# Altium PCB PCB_温湿度传感器v2_2026-05-25.pcbdoc
Units mil, origin at the board's own origin, x right, y up, seen from the top; angles counter-clockwise.
Board outline 2437 x 2255.55 mil, 2 copper layers (Top Layer, Bottom Layer); 4 components, 8 nets, 36 pads, 6 vias.
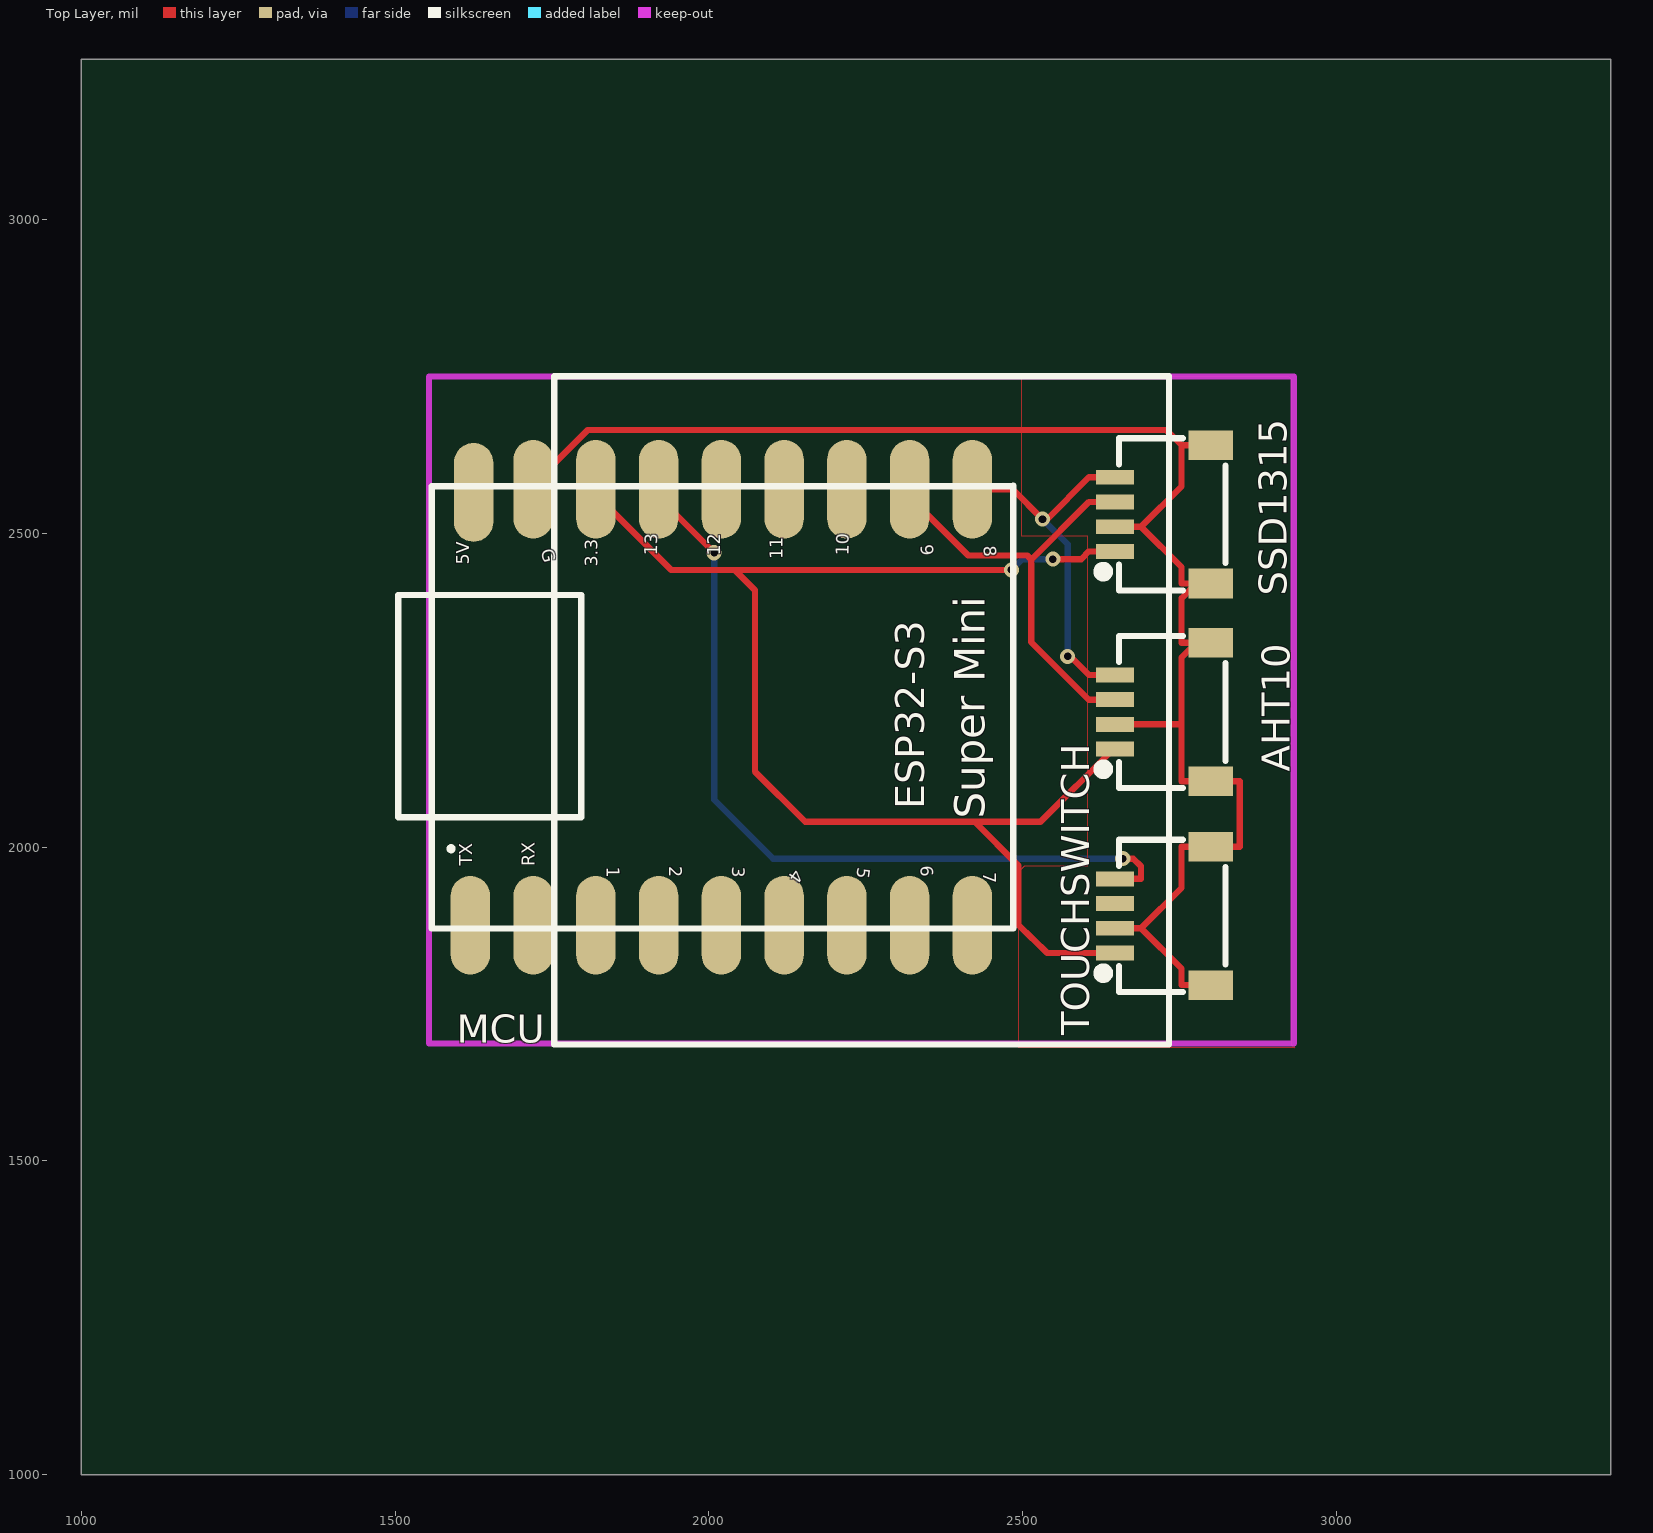
[diagram p0: Top Layer view]
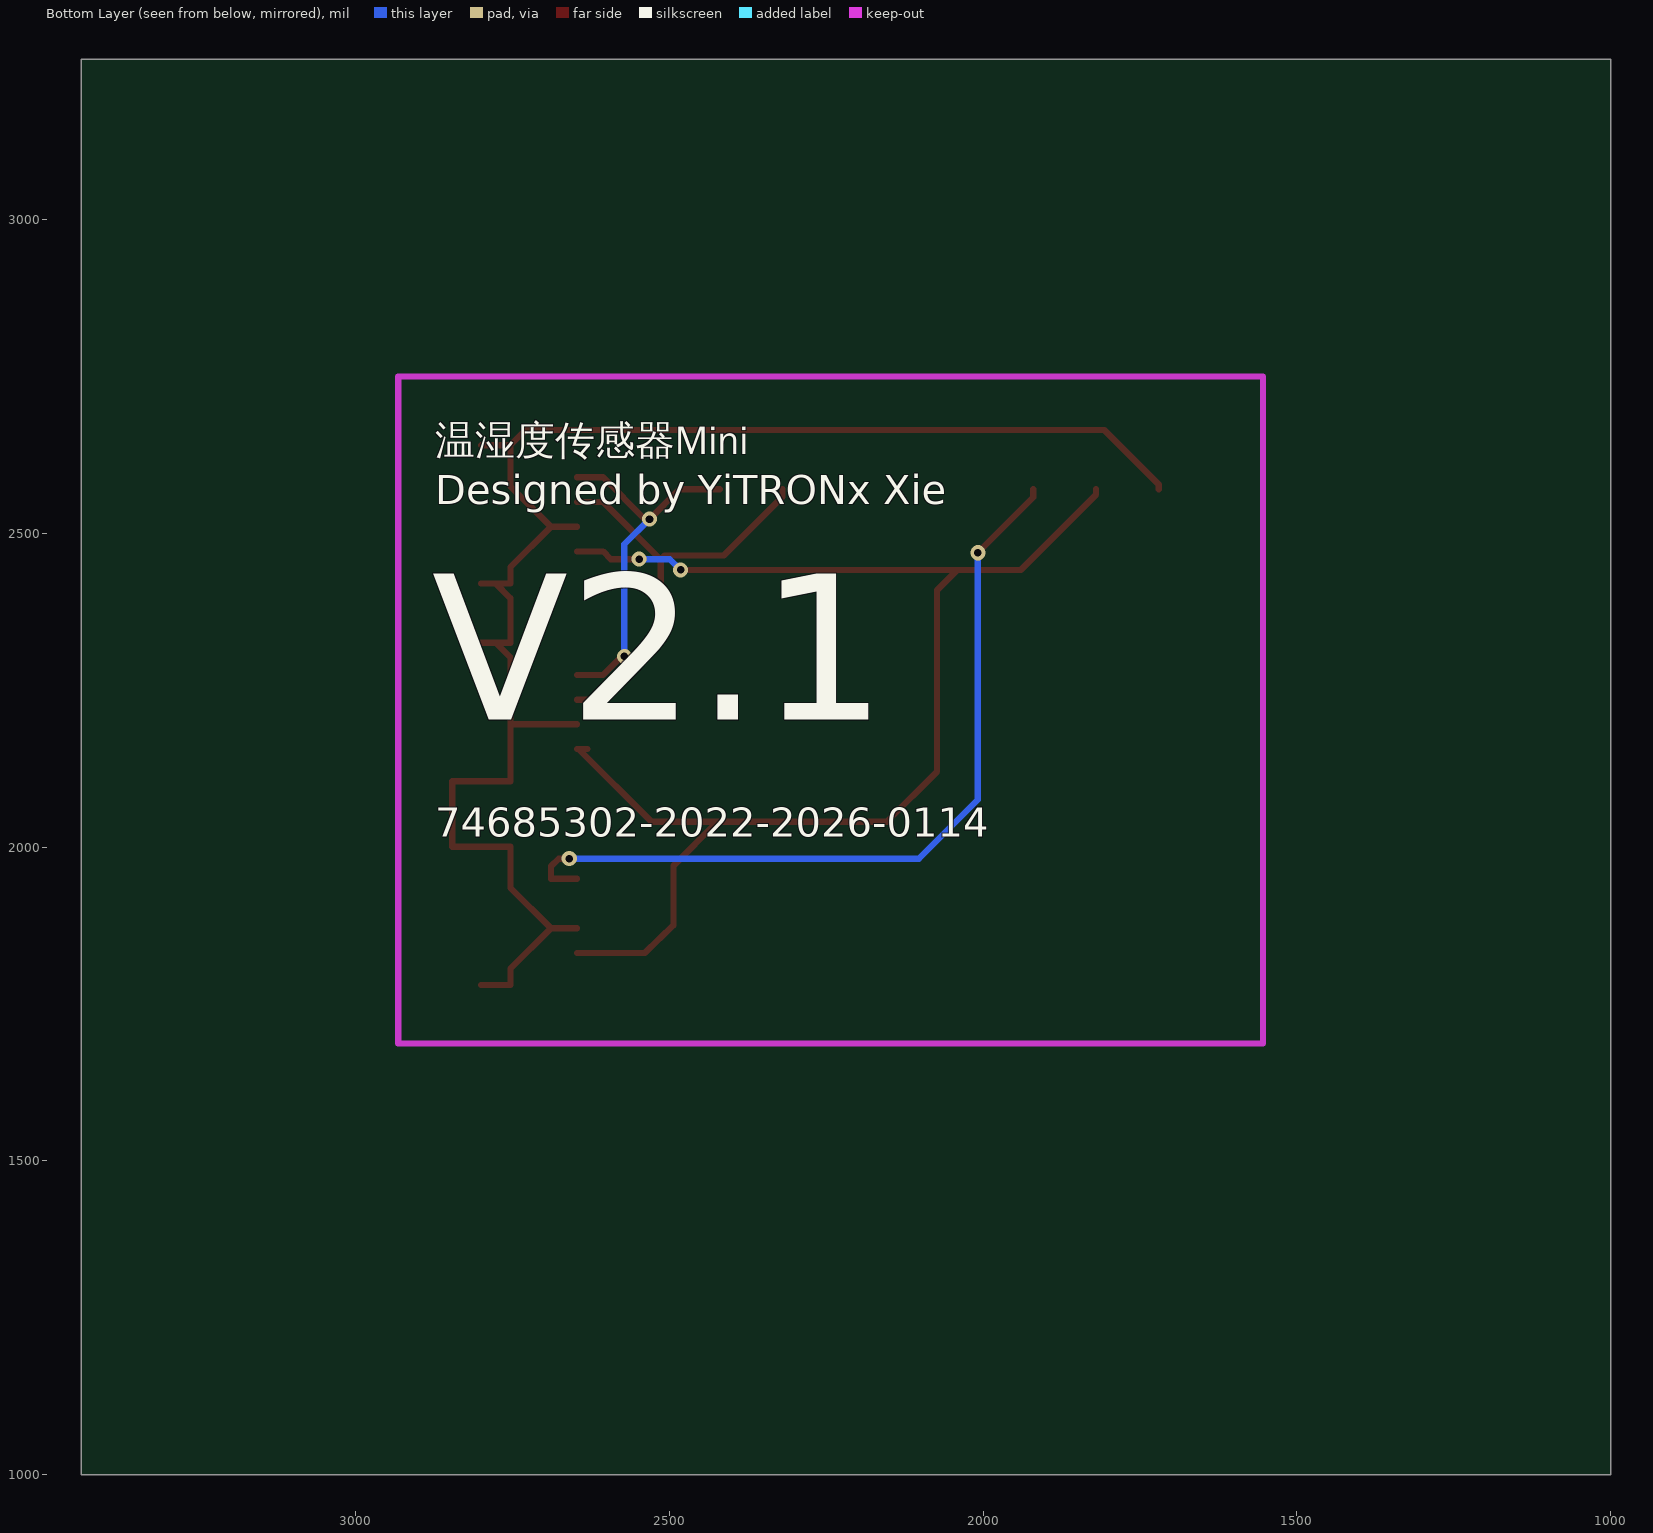
[diagram p1: Bottom Layer view, seen from below]

## Layer stack, top to bottom
Top Layer: signal copper (thickness not stored)
Dielectric: dielectric 12.6, FR-4, Dk 4.8
Bottom Layer: signal copper (thickness not stored)

## Board outline
3437,1000 1000,1000 1000,3255.55 3437,3255.55

## Components (designator, comment, footprint, x,y, rotation, side; value= is the part's Value field where it differs from the comment)
AHT10 "WAFER-SH1.0-4PWT-W1-P" CONN-SMD_WAFER-SH1.0-4PWT-W1-P 2723.46,2215.55 r90 top
MCU "ESP32-S3 SUPERMINI V1" ESP32S3-SUPERMINI-V1 2088.46,2200.55 r90 top
SSD1315 "WAFER-SH1.0-4PWT-W1-P" CONN-SMD_WAFER-SH1.0-4PWT-W1-P 2723.46,2530.55 r90 top
TOUCHSWITCH "WAFER-SH1.0-4PWT-W1-P" CONN-SMD_WAFER-SH1.0-4PWT-W1-P 2723.46,1890.55 r90 top

## Footprints (in the part's own frame and the unit in brackets; to place one, negate y for a bottom-side part, rotate by r counter-clockwise, add the part's x,y. Pads: shape width x height; smd on the part's side, far side on the other; paste and mask are expansions set on the pad)
CONN-SMD_WAFER-SH1.0-4PWT-W1-P [mm]
  rect 0.6x1.55 smd paste+0 mask+0.05: 1(-1.5,1.937) 2(-0.5,1.937) 3(0.5,1.937) 4(1.5,1.937)
  rect 1.2x1.8 smd paste+0 mask+0.05: 5(-2.8,-1.938) 6(2.8,-1.938)
  silkscreen extent -3.08,-2.54 3.08,2.61
ESP32S3-SUPERMINI-V1 [mm]
  oval 4x1.6 smd paste+0 mask+0.051: 3V3(9.398,6.822) 5V(9.271,11.775) GND(9.398,9.362) GPIO1(-8.255,6.822) GPIO2(-8.255,4.282) GPIO3(-8.255,1.742) GPIO4(-8.255,-0.798) GPIO5(-8.255,-3.338) GPIO6(-8.255,-5.878) GPIO7(-8.255,-8.418) GPIO8(9.398,-8.418) GPIO9(9.398,-5.878) GPIO10(9.398,-3.338) GPIO11(9.398,-0.798) GPIO12(9.398,1.742) GPIO13(9.398,4.282) RX(-8.255,9.362) TX(-8.255,11.902)
  silkscreen extent -8.38,-10.07 9.55,14.82

## Via types
v1: diameter 24.02, hole 12.01, Top Layer to Bottom Layer, tented both sides, 6 vias

## Nets (pads, with @x,y where several pads share a name; then routed paths per layer and width w, separated by ;. In a path a pad name is that pad's centre, name@x,y a point inside that pad or via, vN(x,y) a via of type N, cw(c..) or ccw(c..) an arc to the next point about the centre after c; other vN are vias at no path point)
GND: AHT10.2 AHT10.5 AHT10.6 MCU.GND SSD1315.2 SSD1315.5 SSD1315.6 TOUCHSWITCH.2 TOUCHSWITCH.5 TOUCHSWITCH.6 | length 2634.3
  Top Layer w10: MCU.GND@1719.88,2570.55 1719.88,2578.19 1806.66,2664.97 2729.14,2664.97 2753.32,2640.79 ; TOUCHSWITCH.2 2684.72,1870.87 2688.68,1870.87 ; AHT10.2 2753.32,2195.87 ; SSD1315.2 2684.72,2510.87 2688.68,2510.87 ; TOUCHSWITCH.5 2753.32,1780.32 2753.32,1806.23 2688.68,1870.87 ; AHT10.6 AHT10.6@2776.53,2325.79 ; SSD1315.5 SSD1315.5@2776.53,2420.32 ; SSD1315.6 2776.53,2640.79 2753.32,2640.79 ; 2688.68,1870.87 2753.32,1935.51 2753.32,2000.79 TOUCHSWITCH.6 2846.16,2000.79 2846.16,2105.32 AHT10.5 2753.32,2105.32 2753.32,2195.87 ; 2688.68,2510.87 2753.32,2446.23 2753.32,2420.32 SSD1315.5@2776.53,2420.32 ; 2688.68,2510.87 2753.32,2575.51 2753.32,2640.79 ; 2753.32,2195.87 2753.32,2302.58 AHT10.6@2776.53,2325.79 ; AHT10.6@2776.53,2325.79 2753.32,2325.79 2753.32,2397.11 SSD1315.5@2776.53,2420.32
MCU_3V3: AHT10.1 MCU.3V3 SSD1315.1 TOUCHSWITCH.1 | length 2271.3
  Top Layer w10: MCU.3V3@1819.88,2570.55 1819.88,2562.18 1940.14,2441.92 v1(2482.08,2441.92) ; 2041.1,2441.92 2073.46,2409.55 2073.46,2120.55 2153.46,2040.55 2528.46,2040.55 2644.41,2156.49 AHT10.1 AHT10.1@2630.41,2156.5 ; 2421.76,2040.55 2423.46,2040.55 2493.46,1970.55 2493.46,1875.55 2539.36,1831.45 TOUCHSWITCH.1@2647.16,1831.45 ; v1(2548.18,2459.22) 2593.41,2459.22 2605.68,2471.5 SSD1315.1
  Bottom Layer w10: v1(2482.08,2441.92) 2499.39,2459.22 v1(2548.18,2459.22)
MCU_5V: MCU.5V
MCU_GPIO8: AHT10.4 MCU.GPIO8 SSD1315.4 | length 597.6
  Top Layer w10: MCU.GPIO8@2419.89,2570.55 2484.16,2570.55 v1(2531.69,2523.01) 2539.09,2523.01 2605.68,2589.61 SSD1315.4 ; v1(2571.84,2304.29) 2576.01,2304.29 2605.68,2274.61 AHT10.4
  Bottom Layer w10: v1(2531.69,2523.01) 2571.84,2482.87 v1(2571.84,2304.29)
MCU_GPIO9: AHT10.3 MCU.GPIO9 SSD1315.3 | length 721.7
  Top Layer w10: MCU.GPIO9@2319.89,2570.55 2319.89,2558.17 2413.07,2464.98 2507.47,2464.98 2513.95,2458.5 ; AHT10.3 2605.68,2235.24 2513.95,2326.98 2513.95,2458.5 ; SSD1315.3 2605.68,2550.24 2513.95,2458.5
MCU_GPIO13: MCU.GPIO13 TOUCHSWITCH.4 | length 1317.3
  Top Layer w10: MCU.GPIO13@1919.88,2570.55 1919.88,2557.93 v1(2008.44,2469.37) ; TOUCHSWITCH.4 2688.68,1949.61 2688.68,1969.5 2676.41,1981.78 v1(2659.61,1981.78)
  Bottom Layer w10: v1@2008.46,2469.35 2008.46,2075.55 2102.26,1981.75 v1@2659.66,1981.75
MCU_RX: MCU.RX
MCU_TX: MCU.TX
pads on no net: MCU.GPIO1 MCU.GPIO2 MCU.GPIO3 MCU.GPIO4 MCU.GPIO5 MCU.GPIO6 MCU.GPIO7 MCU.GPIO10 MCU.GPIO11 MCU.GPIO12 TOUCHSWITCH.3

## Polygon pours and split planes (outlines as drawn)
GND on Top Layer (solid): 2498.46,2750.55 2923.46,2750.55 2928.46,2745.55 2928.46,1685.55 2933.46,1680.55 2493.46,1680.55 2493.46,1960.55 2503.46,1970.55 2603.46,1970.55 2603.46,2495.55 2498.46,2495.55

## Silkscreen, mask and mechanical layers (free items; w line width, h text height)
Top Overlay:
  lines w10: 1753.46,1685.55 2733.46,1685.55 2733.46,2750.55 1753.46,2750.55 1753.46,1685.55
Bottom Overlay:
  text "温湿度传感器Mini" at 2873.46,2610.55 h80
  text "Designed by YiTRONx Xie" at 2873.46,2530.55 h80
  text "V2.1" at 2878.46,2090.55 h590.55
  text "74685302-2022-2026-0114" at 2873.46,2000.55 h80

## Text inside footprints (layer, text, board x,y; h text height)
MCU: Top Overlay "7" at 2429.88,1959.9 h34.48 r270; Top Overlay "8" at 2429.88,2479.23 h34.48 r275; Top Overlay "Super Mini" at 2439.32,2045.55 h48.87 r90; Top Overlay "ESP32-S3" at 2342.96,2060.55 h46.16 r90; Top Overlay "TX" at 1629.88,1970.55 h34.48 r90; Top Overlay "RX" at 1729.61,1969.75 h34.48 r90; Top Overlay "1" at 1830.21,1968.74 h34.48 r270; Top Overlay "2" at 1929.9,1969.75 h34.48 r270; Top Overlay "3" at 2029.9,1969.85 h34.48 r268; Top Overlay "4" at 2129.89,1970.34 h34.48 r235; Top Overlay "5" at 2229.89,1969.95 h34.48 r262; Top Overlay "6" at 2329.95,1969.95 h34.48 r273; Top Overlay "9" at 2329.88,2480.83 h34.48 r276; Top Overlay "10" at 2229.88,2464.38 h34.48 r89; Top Overlay "11" at 2124.88,2459.03 h34.48 r90; Top Overlay "12" at 2024.88,2464.43 h34.48 r90; Top Overlay "13" at 1924.88,2464.35 h34.48 r89; Top Overlay "3.3" at 1829.88,2447.01 h34.48 r90; Top Overlay "G" at 1724.88,2470.71 h34.48 r284; Top Overlay "5V" at 1624.88,2450.55 h34.48 r90